# Altium PCB PowerBoard.PcbDoc (part 1 of 3)
Units mil, origin at the board's own origin, x right, y up, seen from the top; angles counter-clockwise.
Board outline 7560.09 x 3815.99 mil, 4 copper layers (Top Layer, Internal Plane 2, Internal Plane 1, Bottom Layer); 319 components, 249 nets, 1089 pads, 461 vias.
Unrouted connection lines stored in the file: 1.
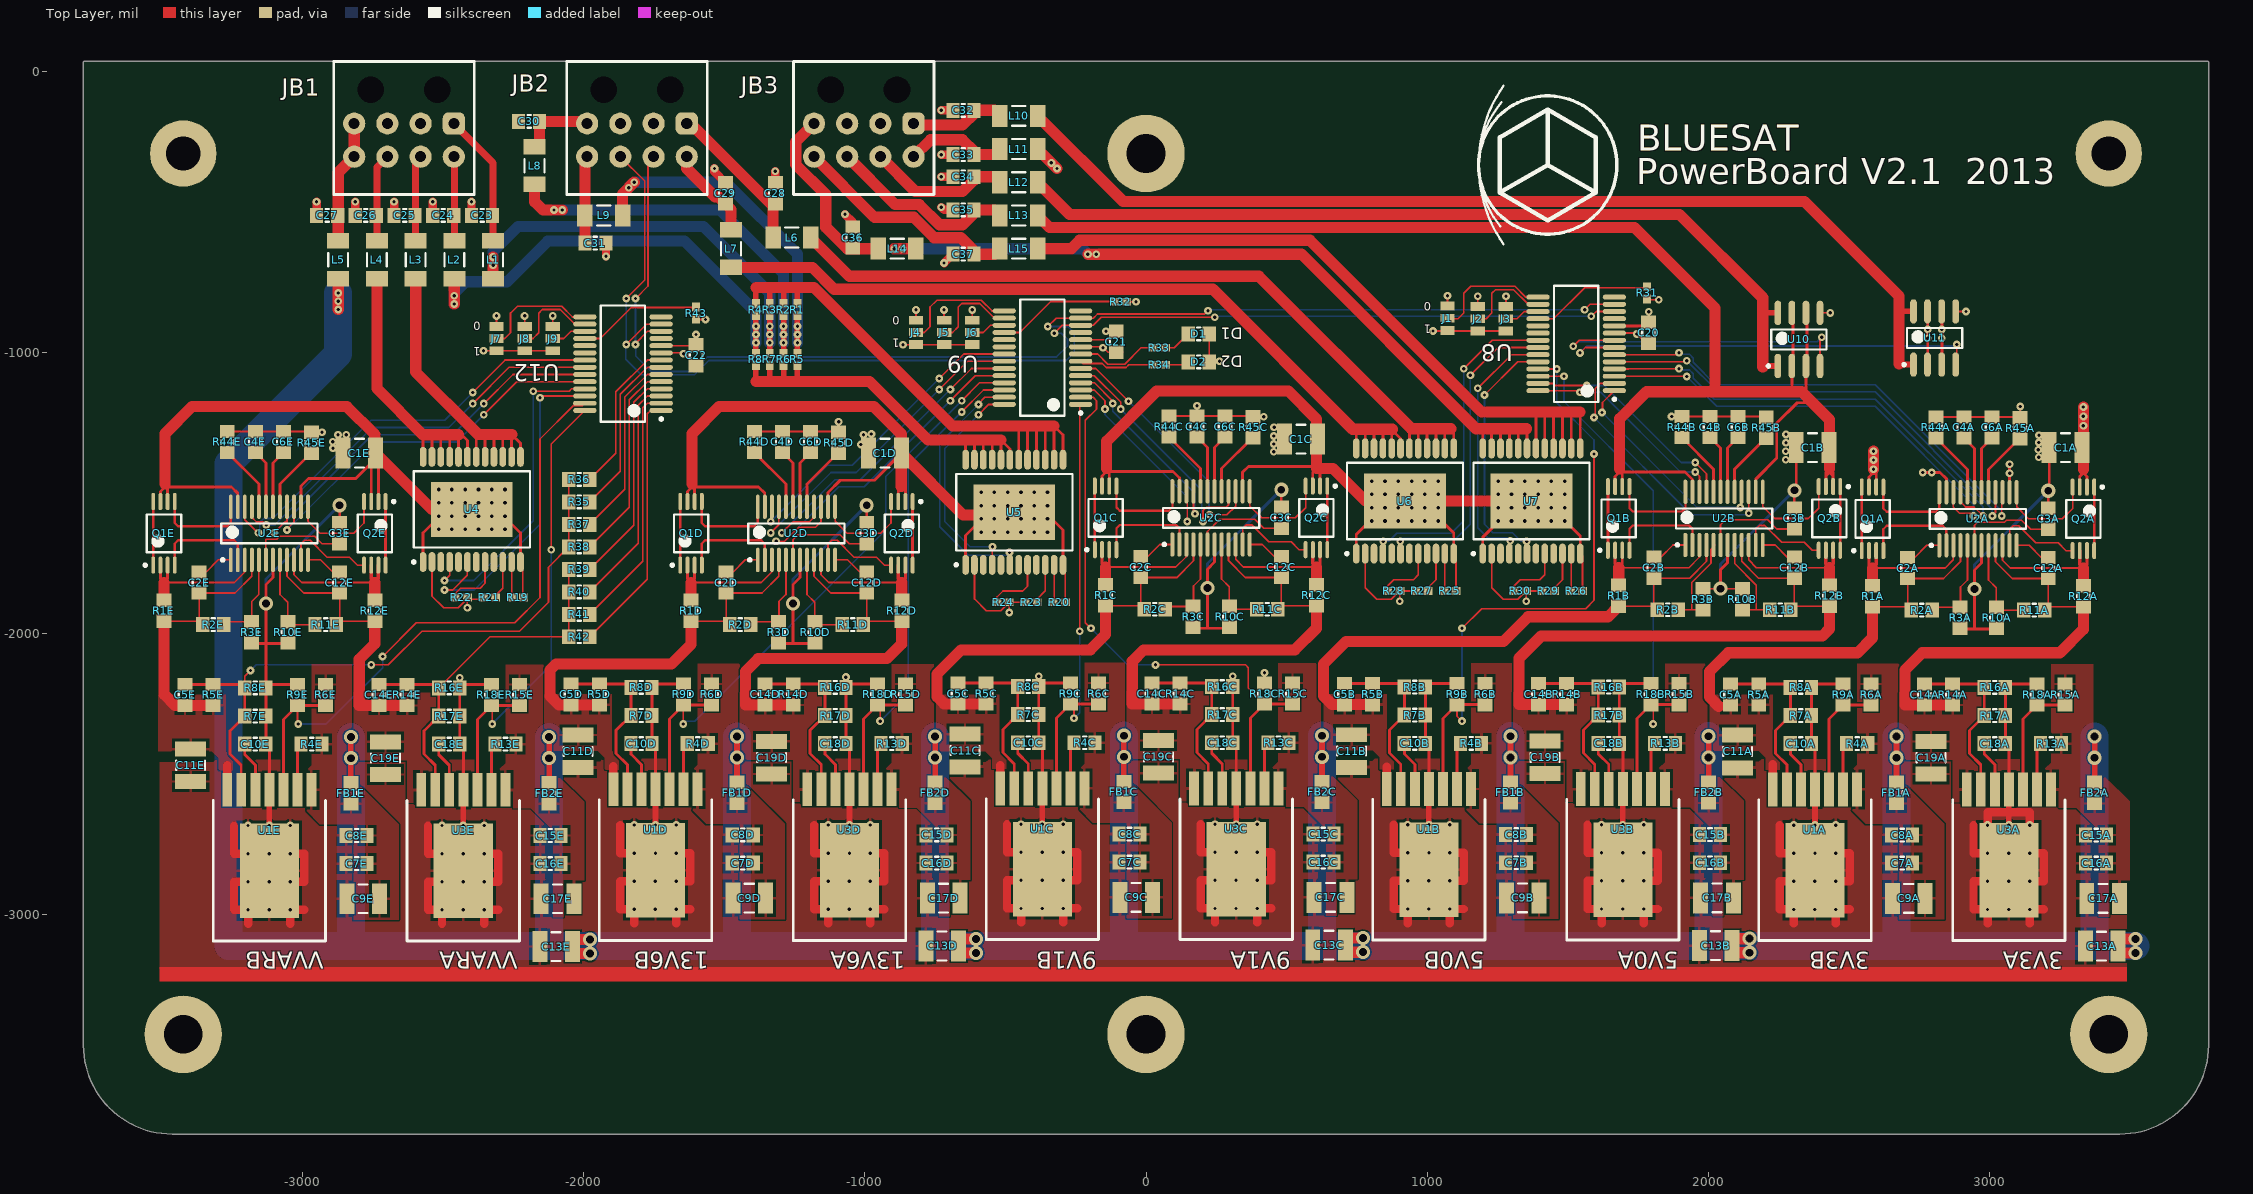
[diagram p0: Top Layer view]
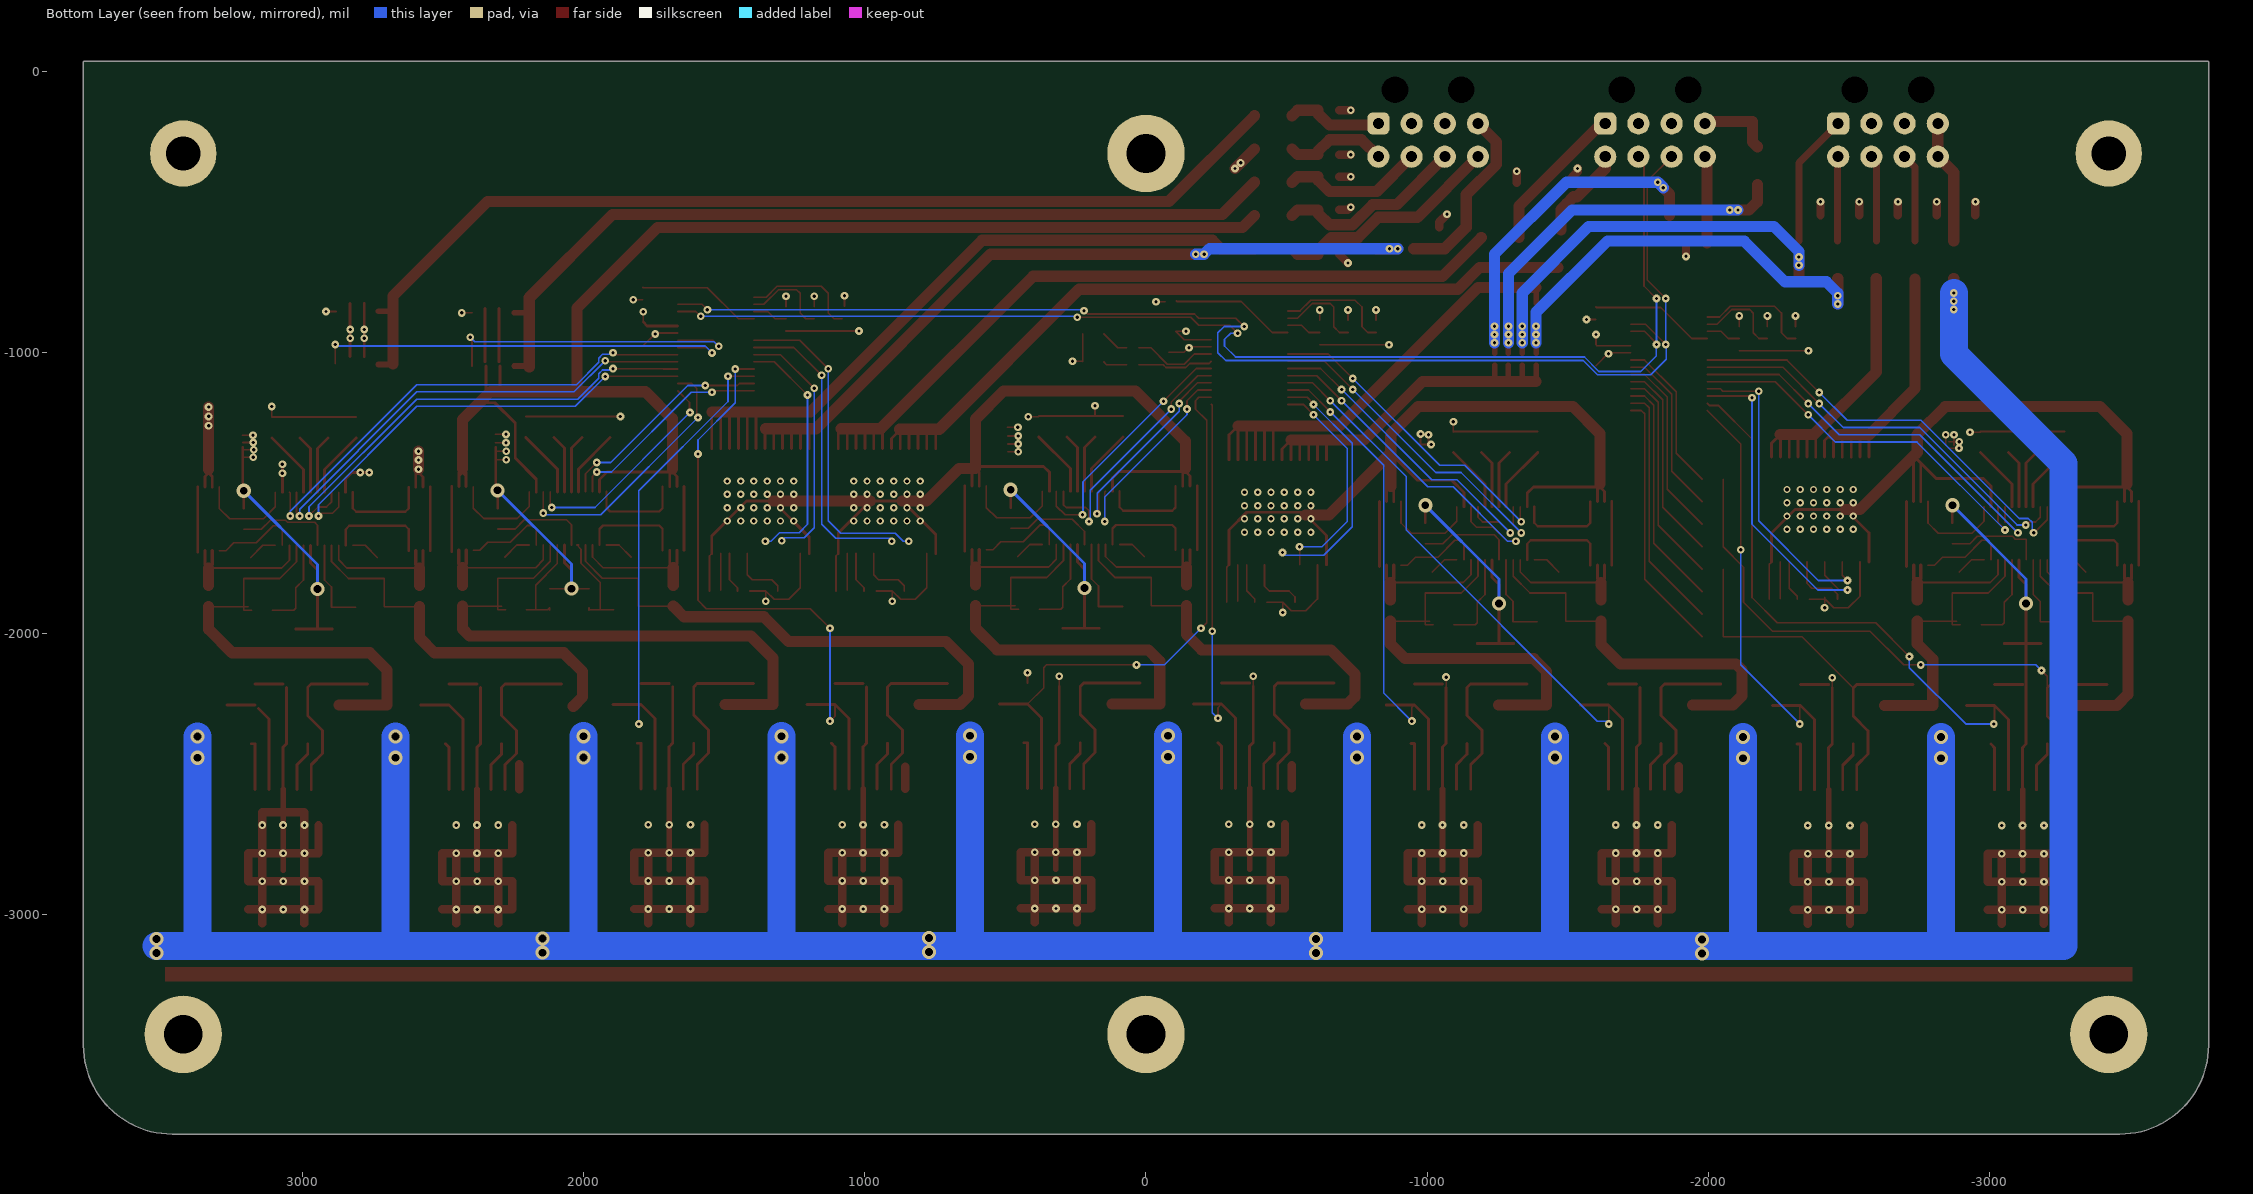
[diagram p1: Bottom Layer view, seen from below]
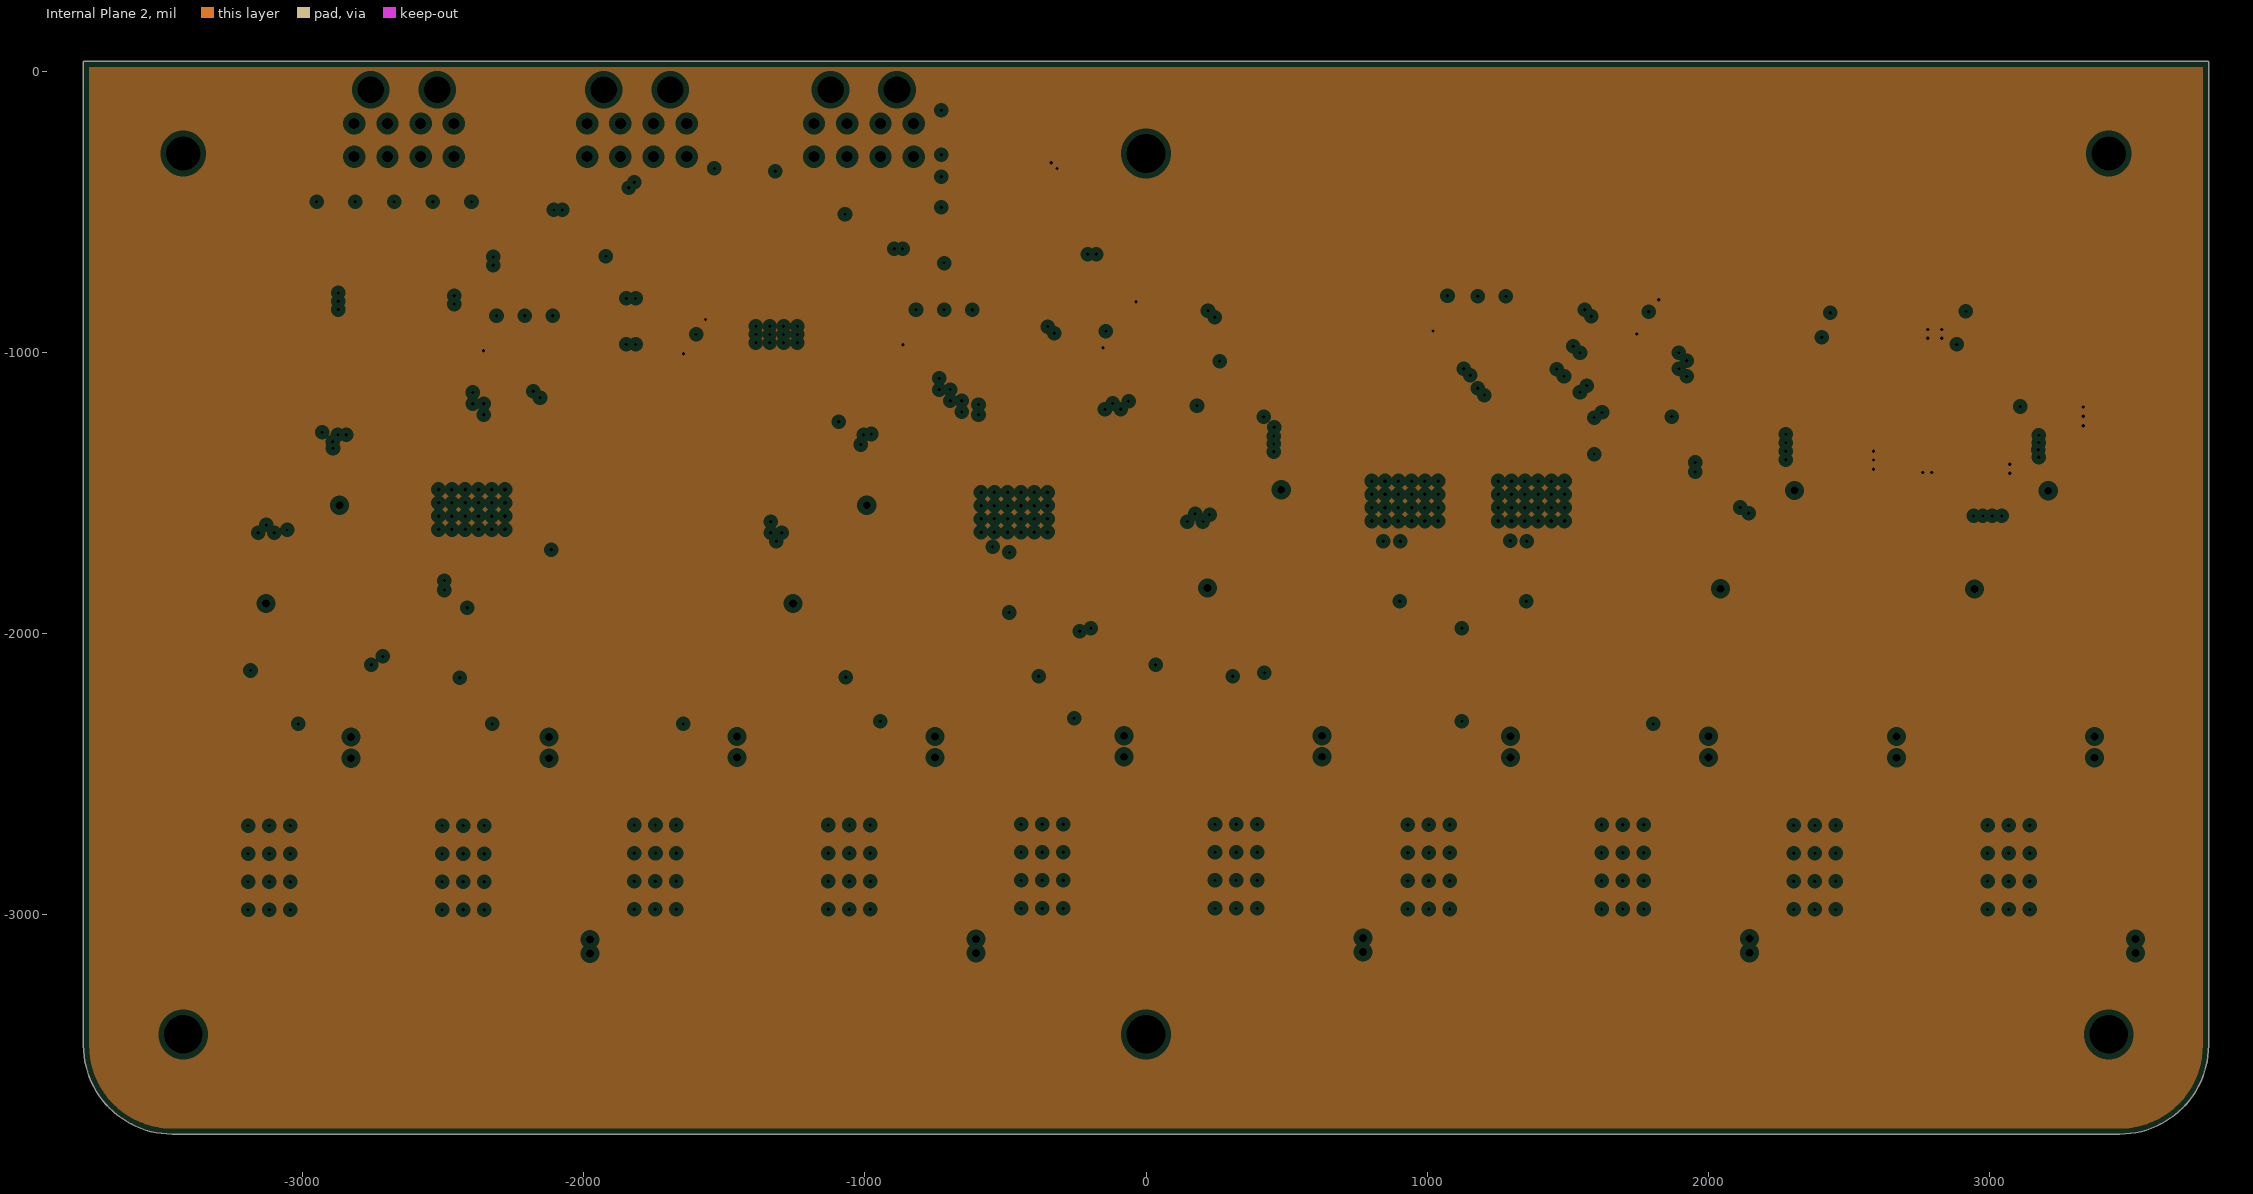
[diagram p2: Internal Plane 2, clearances drawn from the general rule]
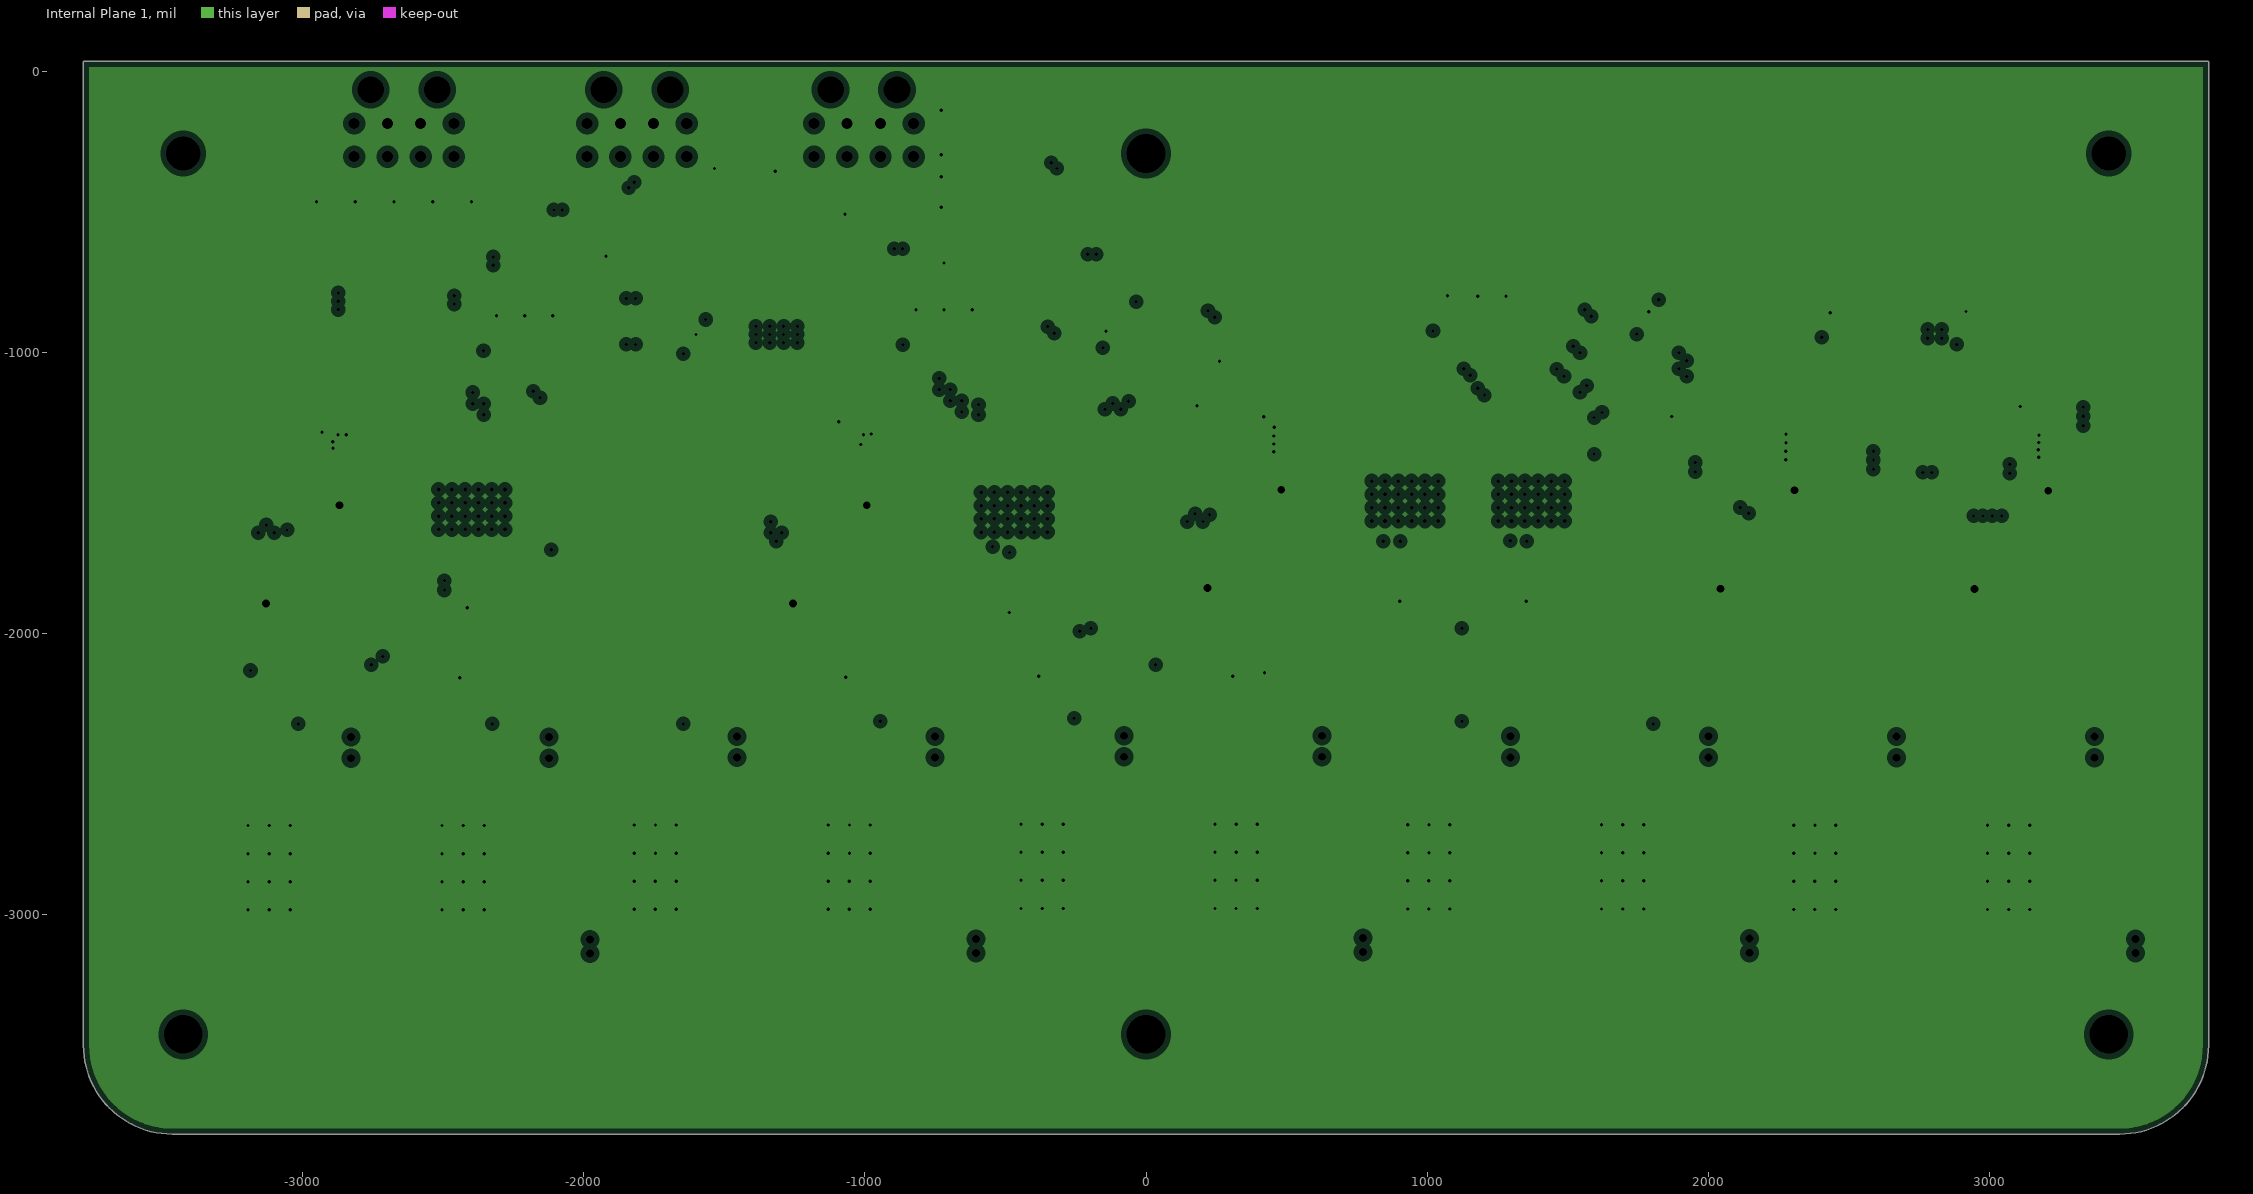
[diagram p3: Internal Plane 1, clearances drawn from the general rule]

## Layer stack, top to bottom
Top Layer: signal copper 1.4
Dielectric: core 12.6, FR-4, Dk 4.8
Internal Plane 2: plane copper 1.4, net 3V3_BUS
Dielectric: prepreg 12.6, FR-4, Dk 4.8
Internal Plane 1: plane copper 1.4, net GND
Dielectric: core 12.6, FR-4, Dk 4.8
Bottom Layer: signal copper 1.4

## Board outline
-3780.04,-3464.57 cw(c-3779.53,-3464.57) -3780.04,-3464.56 -3780.04,35.43 cw(c-3779.53,35.43) -3779.53,35.95 3779.53,35.95 cw(c3779.53,35.43) 3780.04,35.43 3780.04,-3464.57 ccw(c3779.53,-3464.57) 3780.04,-3464.56 3780.04,-3464.57 cw(c3464.57,-3464.57) 3464.57,-3780.04 -3464.57,-3780.04 cw(c-3464.57,-3779.53) -3464.58,-3780.04 cw(c-3464.57,-3464.57)

## Design rules (kind name [scope] priority, off if disabled: settings)
AssemblyTestPointUsage [All] p1 off:
AssemblyTestpoint [All] p1 off: testpointundercomponent=TRUE minsize=40 maxsize=100 preferedsize=60 minholesize=0 maxholesize=40 preferedholesize=32 testpointgrid=1 usegrid=TRUE gridtolerance=0.01 allowsidetop=TRUE allowsidebottom=TRUE
Clearance [All] p1: gap=6
ComponentClearance ComponentClearance_1 [OnLayer('Mechanical 1')] p1: gap=-100 collisioncheckmode=3 verticalgap=-199 showdistances=FALSE
ComponentClearance [All] p2: gap=10 collisioncheckmode=3 verticalgap=10 showdistances=FALSE
FabricationTestPointUsage [All] p1 off: valid=0 allowmultiple=FALSE
FabricationTestpoint [All] p1 off: side=3 testpointundercomponent=TRUE minsize=40 maxsize=100 preferedsize=60 minholesize=0 maxholesize=40 preferedholesize=32 testpointgrid=1 allowsidetop=TRUE allowsidebottom=TRUE usegrid=TRUE gridtolerance=0.01
HoleSize [All] p1: absolutevalues=TRUE maxlimit=10000 minlimit=1 maxpercent=80.000 minpercent=20.000
MinimumSolderMaskSliver [All] p1: minsoldermaskwidth=2
PlaneClearance [All] p1: clearance=20
PlaneConnect PlaneConnect_Vias [IsVia] p1: planeconnectstyle=Direct reliefexpansion=20 reliefentries=4 reliefconductorwidth=10 reliefairgap=10
PlaneConnect [All] p2: planeconnectstyle=Relief reliefexpansion=20 reliefentries=4 reliefconductorwidth=10 reliefairgap=10
PolygonConnect [All] p1: connectstyle=Relief reliefconductorwidth=10 reliefentries=4 polygonreliefangle="90 Angle" airgapwidth=10
RoomDefinition VVAR [InComponentClass('VVAR')] p1 off: confinementstyle=ConfineIn formatcopy=TRUE lockcomponents=FALSE outline -1987.21,-2865.79 -1987.21,-3019.65 -1992.21,-3019.65 -1992.21,-3189.65 -2205.12,-3189.65 -2205.12,-3107.72 -3333.66,-3107.72 -3333.66,-2574.17 -3475.51,-2574.17 -3475.51,-2000.55 -3542.05,-2000.55 -3542.05,-1808.23 -3580.43,-1808.23 -3580.43,-1477.21 -3316.97,-1477.21 -3316.97,-1234.88 -3220.2,-1234.88 -3020.28,-1234.88 -3020.28,-1237.48 -2920.28,-1237.48 -2920.28,-1280.79 -2692.13,-1280.79 -2692.13,-1477.21 -2656.89,-1477.21 -2656.89,-2134.88 -2280.28,-2134.88 -2180.28,-2134.88 -2180.28,-2484.88 -2075.28,-2484.88 -2075.28,-2669.33 -2035.83,-2669.33 -2035.83,-2865.79
RoomDefinition 13V6 [InComponentClass('13V6')] p2 off: confinementstyle=ConfineIn formatcopy=TRUE lockcomponents=FALSE outline -613.58,-2863.86 -613.58,-3017.72 -618.58,-3017.72 -618.58,-3187.72 -831.5,-3187.72 -831.5,-3105.79 -1960.04,-3105.79 -1960.04,-2524.84 -2096.97,-2524.84 -2096.97,-1998.62 -2168.42,-1998.62 -2168.42,-1806.3 -2206.81,-1806.3 -2206.81,-1475.28 -1943.43,-1475.28 -1943.43,-1232.95 -1846.65,-1232.95 -1646.65,-1232.95 -1646.65,-1235.55 -1546.65,-1235.55 -1546.65,-1409.33 -1093.11,-1409.33 -1093.11,-2132.95 -906.65,-2132.95 -806.65,-2132.95 -806.65,-2482.95 -701.65,-2482.95 -701.65,-2667.4 -662.2,-2667.4 -662.2,-2863.86
RoomDefinition 9V1 [InComponentClass('9V1')] p3 off: confinementstyle=ConfineIn formatcopy=TRUE lockcomponents=FALSE outline 762.79,-2860.79 762.79,-3014.65 757.79,-3014.65 757.79,-3184.65 544.88,-3184.65 544.88,-3102.72 -583.66,-3102.72 -583.66,-2521.77 -720.59,-2521.77 -720.59,-1995.55 -792.05,-1995.55 -792.05,-1803.23 -830.43,-1803.23 -830.43,-1472.21 -567.05,-1472.21 -567.05,-1229.88 -470.28,-1229.88 -270.28,-1229.88 -270.28,-1232.48 -170.28,-1232.48 -170.28,-1406.26 283.27,-1406.26 283.27,-2129.88 469.72,-2129.88 569.72,-2129.88 569.72,-2479.88 674.72,-2479.88 674.72,-2664.33 714.17,-2664.33 714.17,-2860.79
RoomDefinition 3V3 [InComponentClass('3V3')] p4 off: confinementstyle=ConfineIn formatcopy=TRUE lockcomponents=FALSE outline 3511.38,-2864.21 3511.38,-3018.07 3506.38,-3018.07 3506.38,-3188.07 3293.46,-3188.07 3293.46,-3106.14 2164.92,-3106.14 2164.92,-2525.2 2027.99,-2525.2 2027.99,-1998.98 1956.53,-1998.98 1956.53,-1806.65 1918.15,-1806.65 1918.15,-1475.63 2181.54,-1475.63 2181.54,-1233.31 2278.31,-1233.31 2478.31,-1233.31 2478.31,-1235.91 2578.31,-1235.91 2578.31,-1409.69 3031.85,-1409.69 3031.85,-2133.31 3218.31,-2133.31 3318.31,-2133.31 3318.31,-2483.31 3423.31,-2483.31 3423.31,-2667.76 3462.76,-2667.76 3462.76,-2864.21
RoutingVias [All] p1: holewidth=11.81 width=27.56 viastyle="Through Hole" minholewidth=11.81 minwidth=23.62 maxholewidth=28 maxwidth=50
SilkToSolderMaskClearance SilkscreenOverComponentPads [IsPad] p1: minsilkscreentomaskgap=3 clearancetoexposedcopper=TRUE
SolderMaskExpansion [All] p1: expansion=1
Width [All] p1: maxlimit=100 minlimit=6 preferedwidth=10
18 further rules are at their usual default settings.

## Classes and differential pairs
channel class RedundantReg: 3V3 5V0 9V1 13V6 VVAR
component class VVAR: C1E C2E C3E C4E C5E C6E C7E C8E C9E C10E C11E C12E C13E C14E C15E C16E C17E C18E C19E FB1E FB2E Q1E Q2E R1E R2E R3E R4E R5E R6E R7E R8E R9E R10E R11E R12E R13E R14E R15E R16E R17E R18E R44E R45E U1E U2E U3E
component class Regulation: C20 C21 C22 D1 D2 J1 J2 J3 J4 J5 J6 J7 J8 J9 R19 R20 R21 R22 R23 R24 R25 R26 R27 R28 R29 R30 R31 R32 R33 R34 R35 R36 R37 R38 R39 R40 R41 R42 R43 U4 U5 U6 U7 U8 U9 U10 U11 U12
component class PowerBoard: C23 C24 C25 C26 C27 C28 C29 C30 C31 C32 C33 C34 C35 C36 C37 JB1 JB2 JB3 L1 L2 L3 L4 L5 L6 L7 L8 L9 L10 L11 L12 L13 L14 L15 R1 R2 R3 R4 R5 R6 R7 R8
component class 13V6: C1D C2D C3D C4D C5D C6D C7D C8D C9D C10D C11D C12D C13D C14D C15D C16D C17D C18D C19D FB1D FB2D Q1D Q2D R1D R2D R3D R4D R5D R6D R7D R8D R9D R10D R11D R12D R13D R14D R15D R16D R17D R18D R44D R45D U1D U2D U3D
component class 9V1: C1C C2C C3C C4C C5C C6C C7C C8C C9C C10C C11C C12C C13C C14C C15C C16C C17C C18C C19C FB1C FB2C Q1C Q2C R1C R2C R3C R4C R5C R6C R7C R8C R9C R10C R11C R12C R13C R14C R15C R16C R17C R18C R44C R45C U1C U2C U3C
component class 5V0: C1B C2B C3B C4B C5B C6B C7B C8B C9B C10B C11B C12B C13B C14B C15B C16B C17B C18B C19B FB1B FB2B Q1B Q2B R1B R2B R3B R4B R5B R6B R7B R8B R9B R10B R11B R12B R13B R14B R15B R16B R17B R18B R44B R45B U1B U2B U3B
component class 3V3: C1A C2A C3A C4A C5A C6A C7A C8A C9A C10A C11A C12A C13A C14A C15A C16A C17A C18A C19A FB1A FB2A Q1A Q2A R1A R2A R3A R4A R5A R6A R7A R8A R9A R10A R11A R12A R13A R14A R15A R16A R17A R18A R44A R45A U1A U2A U3A

## Components (designator, comment, footprint, x,y, rotation, side; value= is the part's Value field where it differs from the comment)
C1A "COUT2" R1210M 3271.42,-1337.72 r0 top (schematic designator C1)
C1B "COUT2" R1210M 2371.42,-1337.72 r0 top (schematic designator C1)
C1C "COUT2" R1210M 551.42,-1307.72 r0 top (schematic designator C1)
C1D "COUT2" R1210M -928.58,-1357.72 r0 top (schematic designator C1)
C1E "COUT2" R1210M -2798.58,-1357.72 r0 top (schematic designator C1)
C2A "" R0805M 2709.92,-1766.14 r90 top (schematic designator C2)
C2B "" R0805M 1806.57,-1764.65 r90 top (schematic designator C2)
C2C "" R0805M -18.66,-1762.72 r90 top (schematic designator C2)
C2D "" R0805M -1493.58,-1817.72 r90 top (schematic designator C2)
C2E "" R0805M -3368.66,-1817.72 r90 top (schematic designator C2)
C3A "" R0805M 3209.92,-1591.14 r90 top (schematic designator C3)
C3B "" R0805M 2306.57,-1589.65 r90 top (schematic designator C3)
C3C "" R0805M 481.34,-1587.72 r90 top (schematic designator C3)
C3D "" R0805M -993.58,-1642.72 r90 top (schematic designator C3)
C3E "" R0805M -2868.66,-1642.72 r90 top (schematic designator C3)
C4A "" R0805M 2909.92,-1266.14 r270 top (schematic designator C4)
C4B "" R0805M 2006.57,-1264.65 r270 top (schematic designator C4)
C4C "" R0805M 181.34,-1262.72 r270 top (schematic designator C4)
C4D "" R0805M -1293.58,-1317.72 r270 top (schematic designator C4)
C4E "" R0805M -3168.66,-1317.72 r270 top (schematic designator C4)
C5A "CFF" R0805M 2079.92,-2216.14 r270 top (schematic designator C5)
C5B "CFF" R0805M 706.57,-2214.65 r270 top (schematic designator C5)
C5C "CFF" R0805M -668.66,-2212.72 r270 top (schematic designator C5)
C5D "CFF" R0805M -2045.04,-2215.79 r270 top (schematic designator C5)
C5E "CFF" R0805M -3418.66,-2217.72 r270 top (schematic designator C5)
C6A "" R0805M 3009.92,-1266.14 r270 top (schematic designator C6)
C6B "" R0805M 2106.57,-1264.65 r270 top (schematic designator C6)
C6C "" R0805M 281.34,-1262.72 r270 top (schematic designator C6)
C6D "" R0805M -1193.58,-1317.72 r270 top (schematic designator C6)
C6E "" R0805M -3068.66,-1317.72 r270 top (schematic designator C6)
C7A "CIN" R0805M 2689.92,-2816.14 r0 top (schematic designator C7)
C7B "CIN" R0805M 1316.57,-2814.65 r0 top (schematic designator C7)
C7C "CIN" R0805M -58.66,-2812.72 r0 top (schematic designator C7)
C7D "CIN" R0805M -1435.04,-2815.79 r0 top (schematic designator C7)
C7E "CIN" R0805M -2808.66,-2817.72 r0 top (schematic designator C7)
C8A "CIN" R0805M 2689.92,-2716.14 r0 top (schematic designator C8)
C8B "CIN" R0805M 1316.57,-2714.65 r0 top (schematic designator C8)
C8C "CIN" R0805M -58.66,-2712.72 r0 top (schematic designator C8)
C8D "CIN" R0805M -1435.04,-2715.79 r0 top (schematic designator C8)
C8E "CIN" R0805M -2808.66,-2717.72 r0 top (schematic designator C8)
C9A "CIN" R1210M 2713.54,-2941.14 r180 top (schematic designator C9)
C9B "CIN" R1210M 1340.2,-2939.65 r180 top (schematic designator C9)
C9C "CIN" R1210M -35.04,-2937.72 r180 top (schematic designator C9)
C9D "CIN" R1210M -1411.42,-2940.79 r180 top (schematic designator C9)
C9E "CIN" R1210M -2785.04,-2942.72 r180 top (schematic designator C9)
C10A "CSS" R0805M 2329.92,-2391.14 r0 top (schematic designator C10)
C10B "CSS" R0805M 956.57,-2389.65 r0 top (schematic designator C10)
C10C "CSS" R0805M -418.66,-2387.72 r0 top (schematic designator C10)
C10D "CSS" R0805M -1795.04,-2390.79 r0 top (schematic designator C10)
C10E "CSS" R0805M -3168.66,-2392.72 r0 top (schematic designator C10)
C11A "COUT" R1210M 2104.92,-2418.74 r90 top (schematic designator C11)
C11B "COUT" R1210M 731.57,-2417.24 r90 top (schematic designator C11)
C11C "COUT" R1210M -643.66,-2415.32 r90 top (schematic designator C11)
C11D "COUT" R1210M -2020.04,-2418.39 r90 top (schematic designator C11)
C11E "COUT" R1210M -3398.58,-2467.72 r90 top (schematic designator C11)
C12A "" R0805M 3209.92,-1766.14 r270 top (schematic designator C12)
C12B "" R0805M 2306.57,-1764.65 r270 top (schematic designator C12)
C12C "" R0805M 481.34,-1762.72 r270 top (schematic designator C12)
C12D "" R0805M -993.58,-1817.72 r270 top (schematic designator C12)
C12E "" R0805M -2868.66,-1817.72 r270 top (schematic designator C12)
C13A "" R1210M 3399.92,-3111.14 r180 top (schematic designator C13)
C13B "" R1210M 2026.57,-3109.65 r180 top (schematic designator C13)
C13C "" R1210M 651.34,-3107.72 r180 top (schematic designator C13)
C13D "" R1210M -725.04,-3110.79 r180 top (schematic designator C13)
C13E "" R1210M -2098.66,-3112.72 r180 top (schematic designator C13)
C14A "CFF" R0805M 2769.92,-2216.14 r270 top (schematic designator C14)
C14B "CFF" R0805M 1396.57,-2214.65 r270 top (schematic designator C14)
C14C "CFF" R0805M 21.34,-2212.72 r270 top (schematic designator C14)
C14D "CFF" R0805M -1355.04,-2215.79 r270 top (schematic designator C14)
C14E "CFF" R0805M -2728.66,-2217.72 r270 top (schematic designator C14)
C15A "CIN" R0805M 3379.92,-2716.14 r0 top (schematic designator C15)
C15B "CIN" R0805M 2006.57,-2714.65 r0 top (schematic designator C15)
C15C "CIN" R0805M 631.34,-2712.72 r0 top (schematic designator C15)
C15D "CIN" R0805M -745.04,-2715.79 r0 top (schematic designator C15)
C15E "CIN" R0805M -2118.66,-2717.72 r0 top (schematic designator C15)
C16A "CIN" R0805M 3379.92,-2816.14 r0 top (schematic designator C16)
C16B "CIN" R0805M 2006.57,-2814.65 r0 top (schematic designator C16)
C16C "CIN" R0805M 631.34,-2812.72 r0 top (schematic designator C16)
C16D "CIN" R0805M -745.04,-2815.79 r0 top (schematic designator C16)
C16E "CIN" R0805M -2118.66,-2817.72 r0 top (schematic designator C16)
C17A "CIN" R1210M 3404.92,-2941.14 r180 top (schematic designator C17)
C17B "CIN" R1210M 2031.57,-2939.65 r180 top (schematic designator C17)
C17C "CIN" R1210M 656.34,-2937.72 r180 top (schematic designator C17)
C17D "CIN" R1210M -720.04,-2940.79 r180 top (schematic designator C17)
C17E "CIN" R1210M -2093.66,-2942.72 r180 top (schematic designator C17)
C18A "CSS" R0805M 3019.92,-2391.14 r0 top (schematic designator C18)
C18B "CSS" R0805M 1646.57,-2389.65 r0 top (schematic designator C18)
C18C "CSS" R0805M 271.34,-2387.72 r0 top (schematic designator C18)
C18D "CSS" R0805M -1105.04,-2390.79 r0 top (schematic designator C18)
C18E "CSS" R0805M -2478.66,-2392.72 r0 top (schematic designator C18)
C19A "COUT" R1210M 2792.99,-2441.14 r90 top (schematic designator C19)
C19B "COUT" R1210M 1419.64,-2439.65 r90 top (schematic designator C19)
C19C "COUT" R1210M 44.41,-2437.72 r90 top (schematic designator C19)
C19D "COUT" R1210M -1331.97,-2440.79 r90 top (schematic designator C19)
C19E "COUT" R1210M -2705.59,-2442.72 r90 top (schematic designator C19)
C20 "" R0805M 1788.19,-928.66 r90 top
C21 "" R0805M -105.91,-960.71 r90 top
C22 "" R0805M -1600.72,-1009.14 r90 top
C23 "" R0805M -2362.2,-511.81 r180 top
C24 "" R0805M -2500,-511.81 r180 top
C25 "" R0805M -2637.8,-511.81 r180 top
C26 "" R0805M -2775.59,-511.81 r180 top
C27 "" R0805M -2913.39,-511.81 r180 top
C28 "" R0805M -1318.9,-433.07 r90 top
C29 "" R0805M -1496.06,-433.07 r90 top
C30 "" R0805M -2194.88,-177.17 r180 top
C31 "" R0805M -1958.66,-610.24 r0 top
C32 "" R0805M -649.61,-137.8 r180 top
C33 "" R0805M -649.61,-295.28 r180 top
C34 "" R0805M -649.61,-374.02 r180 top
C35 "" R0805M -649.61,-492.13 r180 top
C36 "" R0805M -1043.31,-590.55 r90 top
C37 "" R0805M -649.61,-649.61 r180 top
D1 "LED0" R0805M 187.72,-932.76 r0 top
D2 "LED0" R0805M 187.72,-1032.76 r0 top
FB1A "" R0805M 2669.92,-2566.14 r90 top (schematic designator FB1)
FB1B "" R0805M 1296.57,-2564.65 r90 top (schematic designator FB1)
FB1C "" R0805M -78.66,-2562.72 r90 top (schematic designator FB1)
FB1D "" R0805M -1455.04,-2565.79 r90 top (schematic designator FB1)
FB1E "" R0805M -2828.66,-2567.72 r90 top (schematic designator FB1)
FB2A "" R0805M 3374.92,-2566.14 r90 top (schematic designator FB2)
FB2B "" R0805M 2001.57,-2564.65 r90 top (schematic designator FB2)
FB2C "" R0805M 626.34,-2562.72 r90 top (schematic designator FB2)
FB2D "" R0805M -750.04,-2565.79 r90 top (schematic designator FB2)
FB2E "" R0805M -2123.66,-2567.72 r90 top (schematic designator FB2)
J1 "3-WAY JUMPER" J1205M 1072.6,-877.09 r90 top
J2 "3-WAY JUMPER" J1205M 1180.47,-879.01 r90 top
J3 "3-WAY JUMPER" J1205M 1280.47,-879.01 r90 top
J4 "3-WAY JUMPER" J1205M -818.35,-927.72 r90 top
J5 "3-WAY JUMPER" J1205M -718.35,-927.72 r90 top
J6 "3-WAY JUMPER" J1205M -618.35,-927.72 r90 top
J7 "3-WAY JUMPER" J1205M -2310.72,-949.48 r90 top
J8 "3-WAY JUMPER" J1205M -2210.72,-949.48 r90 top
J9 "3-WAY JUMPER" J1205M -2110.72,-949.48 r90 top
JB1 "447640802" "MOLEX 447640802" -2639.76,35.43 r180 top
JB2 "447640802" "MOLEX 447640802" -1811.02,35.43 r180 top
JB3 "447640802" "MOLEX 447640802" -1003.94,35.43 r180 top
L1 "BLM31PG121SN1L" INDC3216M -2322.83,-669.29 r90 top
L2 "BLM31PG121SN1L" INDC3216M -2460.63,-669.29 r90 top
L3 "BLM31PG121SN1L" INDC3216M -2598.43,-669.29 r90 top
L4 "BLM31PG121SN1L" INDC3216M -2736.22,-669.29 r90 top
L5 "BLM31PG121SN1L" INDC3216M -2874.02,-669.29 r90 top
L6 "BLM31PG121SN1L" INDC3216M -1259.84,-590.55 r180 top
L7 "BLM31PG121SN1L" INDC3216M -1476.38,-629.92 r90 top
L8 "BLM31PG121SN1L" INDC3216M -2175.2,-334.65 r90 top
L9 "BLM31PG121SN1L" INDC3216M -1929.13,-511.81 r180 top
L10 "BLM31PG121SN1L" INDC3216M -452.76,-157.48 r180 top
L11 "BLM31PG121SN1L" INDC3216M -452.76,-275.59 r180 top
L12 "BLM31PG121SN1L" INDC3216M -452.76,-393.7 r180 top
L13 "BLM31PG121SN1L" INDC3216M -452.76,-511.81 r180 top
L14 "BLM31PG121SN1L" INDC3216M -885.83,-629.92 r180 top
L15 "BLM31PG121SN1L" INDC3216M -452.76,-629.92 r180 top
Q1A "IRF8852" TSSOP8 2584.92,-1591.14 r90 top (schematic designator Q1)
Q1B "IRF8852" TSSOP8 1681.57,-1589.65 r90 top (schematic designator Q1)
Q1C "IRF8852" TSSOP8 -143.66,-1587.72 r90 top (schematic designator Q1)
Q1D "IRF8852" TSSOP8 -1618.58,-1642.72 r90 top (schematic designator Q1)
Q1E "IRF8852" TSSOP8 -3493.66,-1642.72 r90 top (schematic designator Q1)
Q2A "IRF8852" TSSOP8 3334.92,-1591.14 r270 top (schematic designator Q2)
Q2B "IRF8852" TSSOP8 2431.57,-1589.65 r270 top (schematic designator Q2)
Q2C "IRF8852" TSSOP8 606.34,-1587.72 r270 top (schematic designator Q2)
Q2D "IRF8852" TSSOP8 -868.58,-1642.72 r270 top (schematic designator Q2)
Q2E "IRF8852" TSSOP8 -2743.66,-1642.72 r270 top (schematic designator Q2)
R1 "" R0402M -1240.16,-846.46 r270 top
R1A "ISENSE" R0805M 2584.92,-1866.14 r90 top (schematic designator R1)
R1B "ISENSE" R0805M 1681.57,-1864.65 r90 top (schematic designator R1)
R1C "ISENSE" R0805M -143.66,-1862.72 r90 top (schematic designator R1)
R1D "ISENSE" R0805M -1618.58,-1917.72 r90 top (schematic designator R1)
R1E "ISENSE" R0805M -3493.66,-1917.72 r90 top (schematic designator R1)
R2 "" R0402M -1289.37,-846.46 r90 top
R2A "ON1" R0805M 2759.92,-1916.14 r0 top (schematic designator R2)
R2B "ON1" R0805M 1856.57,-1914.65 r0 top (schematic designator R2)
R2C "ON1" R0805M 31.34,-1912.72 r0 top (schematic designator R2)
R2D "ON1" R0805M -1443.58,-1967.72 r0 top (schematic designator R2)
R2E "ON1" R0805M -3318.66,-1967.72 r0 top (schematic designator R2)
R3 "" R0402M -1338.58,-846.46 r90 top
R3A "ON2" R0805M 2896.42,-1942.72 r90 top (schematic designator R3)
R3B "ON2" R0805M 1981.42,-1877.72 r270 top (schematic designator R3)
R3C "ON2" R0805M 167.83,-1939.29 r90 top (schematic designator R3)
R3D "ON2" R0805M -1307.09,-1994.29 r90 top (schematic designator R3)
R3E "ON2" R0805M -3182.17,-1994.29 r90 top (schematic designator R3)
R4 "" R0402M -1387.8,-846.46 r90 top
R4A "RON" R0805M 2529.92,-2391.14 r0 top (schematic designator R4)
R4B "RON" R0805M 1156.57,-2389.65 r0 top (schematic designator R4)
R4C "RON" R0805M -218.66,-2387.72 r0 top (schematic designator R4)
R4D "RON" R0805M -1595.04,-2390.79 r0 top (schematic designator R4)
R4E "RON" R0805M -2968.66,-2392.72 r0 top (schematic designator R4)
R5 "" R0402M -1240.16,-1023.62 r90 top
R5A "RFBT" R0805M 2179.92,-2216.14 r270 top (schematic designator R5)
R5B "RFBT" R0805M 806.57,-2214.65 r270 top (schematic designator R5)
R5C "RFBT" R0805M -568.66,-2212.72 r270 top (schematic designator R5)
R5D "RFBT" R0805M -1945.04,-2215.79 r270 top (schematic designator R5)
R5E "RFBT" R0805M -3318.66,-2217.72 r270 top (schematic designator R5)
R6 "" R0402M -1289.37,-1023.62 r270 top
R6A "RENT" R0805M 2579.92,-2216.14 r270 top (schematic designator R6)
R6B "RENT" R0805M 1206.57,-2214.65 r270 top (schematic designator R6)
R6C "RENT" R0805M -168.66,-2212.72 r270 top (schematic designator R6)
R6D "RENT" R0805M -1545.04,-2215.79 r270 top (schematic designator R6)
R6E "RENT" R0805M -2918.66,-2217.72 r270 top (schematic designator R6)
R7 "" R0402M -1338.58,-1023.62 r270 top
R7A "RFBB" R0805M 2329.92,-2291.14 r180 top (schematic designator R7)
R7B "RFBB" R0805M 956.57,-2289.65 r180 top (schematic designator R7)
R7C "RFBB" R0805M -418.66,-2287.72 r180 top (schematic designator R7)
R7D "RFBB" R0805M -1795.04,-2290.79 r180 top (schematic designator R7)
R7E "RFBB" R0805M -3168.66,-2292.72 r180 top (schematic designator R7)
R8 "" R0402M -1387.8,-1023.62 r270 top
R8A "RFBB" R0805M 2329.92,-2191.14 r180 top (schematic designator R8)
R8B "RFBB" R0805M 956.57,-2189.65 r180 top (schematic designator R8)
R8C "RFBB" R0805M -418.66,-2187.72 r180 top (schematic designator R8)
R8D "RFBB" R0805M -1795.04,-2190.79 r180 top (schematic designator R8)
R8E "RFBB" R0805M -3168.66,-2192.72 r180 top (schematic designator R8)
R9A "RENB" R0805M 2479.92,-2216.14 r90 top (schematic designator R9)
R9B "RENB" R0805M 1106.57,-2214.65 r90 top (schematic designator R9)
R9C "RENB" R0805M -268.66,-2212.72 r90 top (schematic designator R9)
R9D "RENB" R0805M -1645.04,-2215.79 r90 top (schematic designator R9)
R9E "RENB" R0805M -3018.66,-2217.72 r90 top (schematic designator R9)
R10A "ON2" R0805M 3026.42,-1942.72 r90 top (schematic designator R10)
R10B "ON2" R0805M 2121.57,-1877.72 r270 top (schematic designator R10)
R10C "ON2" R0805M 297.83,-1939.29 r90 top (schematic designator R10)
R10D "ON2" R0805M -1177.09,-1994.29 r90 top (schematic designator R10)
R10E "ON2" R0805M -3052.17,-1994.29 r90 top (schematic designator R10)
R11A "ON1" R0805M 3159.92,-1916.14 r180 top (schematic designator R11)
R11B "ON1" R0805M 2256.57,-1914.65 r180 top (schematic designator R11)
R11C "ON1" R0805M 431.34,-1912.72 r180 top (schematic designator R11)
R11D "ON1" R0805M -1043.58,-1967.72 r180 top (schematic designator R11)
R11E "ON1" R0805M -2918.66,-1967.72 r180 top (schematic designator R11)
R12A "ISENSE" R0805M 3334.92,-1866.14 r90 top (schematic designator R12)
R12B "ISENSE" R0805M 2431.57,-1864.65 r90 top (schematic designator R12)
R12C "ISENSE" R0805M 606.34,-1862.72 r90 top (schematic designator R12)
R12D "ISENSE" R0805M -868.58,-1917.72 r90 top (schematic designator R12)
R12E "ISENSE" R0805M -2743.66,-1917.72 r90 top (schematic designator R12)
R13A "RON" R0805M 3219.92,-2391.14 r0 top (schematic designator R13)
R13B "RON" R0805M 1846.57,-2389.65 r0 top (schematic designator R13)
R13C "RON" R0805M 471.34,-2387.72 r0 top (schematic designator R13)
R13D "RON" R0805M -905.04,-2390.79 r0 top (schematic designator R13)
R13E "RON" R0805M -2278.66,-2392.72 r0 top (schematic designator R13)
R14A "RFBT" R0805M 2869.92,-2216.14 r270 top (schematic designator R14)
R14B "RFBT" R0805M 1496.57,-2214.65 r270 top (schematic designator R14)
R14C "RFBT" R0805M 121.34,-2212.72 r270 top (schematic designator R14)
R14D "RFBT" R0805M -1255.04,-2215.79 r270 top (schematic designator R14)
R14E "RFBT" R0805M -2628.66,-2217.72 r270 top (schematic designator R14)
R15A "RENT" R0805M 3269.92,-2216.14 r270 top (schematic designator R15)
R15B "RENT" R0805M 1896.57,-2214.65 r270 top (schematic designator R15)
R15C "RENT" R0805M 521.34,-2212.72 r270 top (schematic designator R15)
R15D "RENT" R0805M -855.04,-2215.79 r270 top (schematic designator R15)
R15E "RENT" R0805M -2228.66,-2217.72 r270 top (schematic designator R15)
R16A "RFBB" R0805M 3019.92,-2191.14 r180 top (schematic designator R16)
R16B "RFBB" R0805M 1646.57,-2189.65 r180 top (schematic designator R16)
R16C "RFBB" R0805M 271.34,-2187.72 r180 top (schematic designator R16)
R16D "RFBB" R0805M -1105.04,-2190.79 r180 top (schematic designator R16)
R16E "RFBB" R0805M -2478.66,-2192.72 r180 top (schematic designator R16)
R17A "RFBB" R0805M 3019.92,-2291.14 r180 top (schematic designator R17)
R17B "RFBB" R0805M 1646.57,-2289.65 r180 top (schematic designator R17)
R17C "RFBB" R0805M 271.34,-2287.72 r180 top (schematic designator R17)
R17D "RFBB" R0805M -1105.04,-2290.79 r180 top (schematic designator R17)
R17E "RFBB" R0805M -2478.66,-2292.72 r180 top (schematic designator R17)
R18A "RENB" R0805M 3169.92,-2216.14 r90 top (schematic designator R18)
R18B "RENB" R0805M 1796.57,-2214.65 r90 top (schematic designator R18)
R18C "RENB" R0805M 421.34,-2212.72 r90 top (schematic designator R18)
R18D "RENB" R0805M -955.04,-2215.79 r90 top (schematic designator R18)
R18E "RENB" R0805M -2328.66,-2217.72 r90 top (schematic designator R18)
R19 "" R0402M -2235.91,-1870.71 r180 top
R20 "" R0402M -308.58,-1887.72 r180 top
R21 "" R0402M -2335.91,-1870.71 r180 top
R22 "" R0402M -2435.91,-1870.71 r0 top
R23 "" R0402M -408.58,-1887.72 r180 top
R24 "" R0402M -508.58,-1887.72 r0 top
R25 "" R0402M 1081.42,-1847.72 r180 top
R26 "" R0402M 1531.42,-1847.72 r180 top
R27 "" R0402M 981.42,-1847.72 r180 top
R28 "" R0402M 881.42,-1847.72 r0 top
R29 "" R0402M 1431.42,-1847.72 r180 top
R30 "" R0402M 1331.42,-1847.72 r0 top
R31 "" R0402M 1782.6,-787.09 r90 top
R32 "" R0402M -90.55,-818.9 r180 top
R33 "" R0402M 47.72,-982.76 r0 top
R34 "" R0402M 47.72,-1042.76 r0 top
R35 "VSET_1" R0805M -2015.91,-1530.71 r180 top
R36 "VSET_1" R0805M -2015.91,-1450.71 r180 top
R37 "VSET_1" R0805M -2015.91,-1610.71 r180 top
R38 "VSET_1" R0805M -2015.91,-1690.71 r180 top
R39 "VSET_1" R0805M -2015.91,-1770.71 r180 top
R40 "VSET_1" R0805M -2015.91,-1850.71 r180 top
R41 "VSET_1" R0805M -2015.91,-1930.71 r180 top
R42 "VSET_1" R0805M -2015.91,-2010.71 r180 top
R43 "" R0402M -1600.72,-859.14 r90 top
R44A "" R0805M 2809.92,-1266.14 r90 top (schematic designator R44)
R44B "" R0805M 1906.57,-1264.65 r90 top (schematic designator R44)
R44C "" R0805M 81.34,-1262.72 r90 top (schematic designator R44)
R44D "" R0805M -1393.58,-1317.72 r90 top (schematic designator R44)
R44E "" R0805M -3268.58,-1317.72 r90 top (schematic designator R44)
R45A "" R0805M 3109.92,-1268.74 r90 top (schematic designator R45)
R45B "" R0805M 2206.57,-1267.25 r90 top (schematic designator R45)
R45C "" R0805M 381.34,-1265.32 r90 top (schematic designator R45)
R45D "" R0805M -1093.58,-1320.31 r90 top (schematic designator R45)
R45E "" R0805M -2968.66,-1320.32 r90 top (schematic designator R45)
U1A "LMZ14201H" TO-PMOD-7 2379.92,-2841.14 r180 top (schematic designator U1)
U1B "LMZ14201H" TO-PMOD-7 1006.57,-2839.65 r180 top (schematic designator U1)
U1C "LMZ14201H" TO-PMOD-7 -368.66,-2837.72 r180 top (schematic designator U1)
U1D "LMZ14201H" TO-PMOD-7 -1745.04,-2840.79 r180 top (schematic designator U1)
U1E "LMZ14201H" TO-PMOD-7 -3118.66,-2842.72 r180 top (schematic designator U1)
U2A "LTC4225" SSOP24 2959.92,-1591.14 r90 top (schematic designator U2)
U2B "LTC4225" SSOP24 2056.57,-1589.65 r90 top (schematic designator U2)
U2C "LTC4225" SSOP24 231.34,-1587.72 r90 top (schematic designator U2)
U2D "LTC4225" SSOP24 -1243.58,-1642.71 r90 top (schematic designator U2)
U2E "LTC4225" SSOP24 -3118.66,-1642.72 r90 top (schematic designator U2)
U3A "LMZ14201H" TO-PMOD-7 3069.92,-2841.14 r180 top (schematic designator U3)
U3B "LMZ14201H" TO-PMOD-7 1696.57,-2839.65 r180 top (schematic designator U3)
U3C "LMZ14201H" TO-PMOD-7 321.34,-2837.72 r180 top (schematic designator U3)
U3D "LMZ14201H" TO-PMOD-7 -1055.04,-2840.79 r180 top (schematic designator U3)
U3E "LMZ14201H" TO-PMOD-7 -2428.66,-2842.72 r180 top (schematic designator U3)
U4 "VND5E025AK-E" SSO24 -2398.58,-1557.72 r90 top
U5 "VND5E025AK-E" SSO24 -468.58,-1567.72 r90 top
U6 "VND5E025AK-E" SSO24 921.42,-1527.72 r90 top
U7 "VND5E025AK-E" SSO24 1371.42,-1527.72 r90 top
U8 "MCP23017" SSOP28 1530.47,-968.66 r180 top
U9 "MCP23017" SSOP28 -368.35,-1017.72 r180 top
U10 "LTC1477" SO8 2322.91,-952.87 r90 top
U11 "LTC1477" SO8 2805.39,-947.72 r90 top
U12 "MCP23017" SSOP28 -1860.72,-1039.14 r180 top

## Footprints (in the part's own frame and the unit in brackets; to place one, negate y for a bottom-side part, rotate by r counter-clockwise, add the part's x,y. Pads: shape width x height; smd on the part's side, far side on the other; paste and mask are expansions set on the pad)
INDC3216M [mm] "Chip Inductor, Body 3.2x1.6mm, IPC Low Density"
  rect 1.4x2 smd: 1(-1.7,0) 2(1.7,0)
  silkscreen extent -0.6,-0.9 0.6,0.9, body extent -1.75,-0.95 1.75,0.95, height 1.9
J1205M [mm] "Chip Resistor, 2-Leads, Body 1.0x0.5mm, IPC Medium Density"
  rect 0.8x1.3 smd: 1(-1.109,0) 2(-0.009,0) 3(1.091,0)
  body extent -1.32,-0.51 1.35,0.51, height 0.6
"MOLEX 447640802" [mm] "B2B RA Receptacle"
  rrect50% 2x2 hole 1: 1(-4.5,5.59)
  round 2 hole 1: 2(-4.5,8.59) 3(-1.5,5.59) 4(-1.5,8.59) 5(1.5,5.59) 6(1.5,8.59) 7(4.5,5.59) 8(4.5,8.59)
  round 0 hole 2.4 unplated: M1(-3,2.54) M2(3,2.54)
  silkscreen extent -6.35,0 6.35,12.01, body extent -6.35,-8.98 6.35,12, height 10.53
R0402M [mm] "Chip Resistor, 2-Leads, Body 1.0x0.5mm, IPC Medium Density"
  rect 0.8x0.7 smd: 1(-0.55,0) 2(0.55,0)
  body extent -0.55,-0.3 0.55,0.3, height 0.6
R0805M [mm] "Chip Resistor, 2-Leads, Body 2.0x1.3mm, IPC Medium Density"
  rect 1.2x1.35 smd: 1(-0.95,0) 2(0.95,0)
  silkscreen extent -0.15,-0.58 0.15,0.58, body extent -1.1,-0.67 1.1,0.67, height 0.6
R1210M [mm] "Chip Capacitor, 2-Leads, Body 3.2x2.5mm, IPC Medium Density"
  rect 1.35x2.8 smd: 1(-1.475,0) 2(1.475,0)
  silkscreen extent -0.4,-1.3 0.4,1.3, body extent -1.75,-1.4 1.75,1.4, height 1.5
SO8 [mm]
  oval 2.2x0.6 smd: 1(-2.4,1.905) 2(-2.4,0.635) 3(-2.4,-0.635) 4(-2.4,-1.905) 5(2.4,-1.905) 6(2.4,-0.635) 7(2.4,0.635) 8(2.4,1.905)
  silkscreen extent -2.52,-2.5 0.9,2.88, body extent -2,-2.5 2,2.5, height 1.8
SSO24 [mm]
  oval 1.8x0.6 smd: 3(-4.75,2.8) 5(-4.75,1.2) 7(-4.75,-0.4) 9(-4.75,-2) CS1(-4.75,-1.2) CS2(-4.75,-2.8) CS_DIS(-4.75,-3.6) GND(-4.75,3.6) IN1(-4.75,0.4) IN2(-4.75,2) OUT1(4.75,-4.4) OUT1(4.75,-3.6) OUT1(4.75,-2.8) OUT1(4.75,-2) OUT1(4.75,-1.2) OUT1(4.75,-0.4) OUT2(4.75,0.4) OUT2(4.75,1.2) OUT2(4.75,2) OUT2(4.75,2.8) OUT2(4.75,3.6) OUT2(4.75,4.4) VCC(-4.75,-4.4) VCC(-4.75,4.4)
  rect 5x7.4 smd: VCC(0,0)
  silkscreen extent -4.87,-5.25 3.45,5.37, body extent -3.8,-5.25 3.8,5.25, height 2.45
SSOP24 [mm]
  oval 2.2x0.35 smd: 1(-2.4,3.492) 2(-2.4,2.857) 3(-2.4,2.222) 4(-2.4,1.587) 5(-2.4,0.952) 6(-2.4,0.317) 7(-2.4,-0.318) 8(-2.4,-0.953) 9(-2.4,-1.588) 10(-2.4,-2.222) 11(-2.4,-2.857) 12(-2.4,-3.492) 13(2.4,-3.492) 14(2.4,-2.857) 15(2.4,-2.222) 16(2.4,-1.587) 17(2.4,-0.952) 18(2.4,-0.317) 19(2.4,0.318) 20(2.4,0.953) 21(2.4,1.588) 22(2.4,2.222) 23(2.4,2.857) 24(2.4,3.492)
  silkscreen extent -2.52,-4.35 0.9,4.35, body extent -2,-4.35 2,4.35, height 1.1
SSOP28 [mm]
  oval 2.1x0.45 smd: 1(-3.45,4.225) 2(-3.45,3.575) 3(-3.45,2.925) 4(-3.45,2.275) 5(-3.45,1.625) 6(-3.45,0.975) 7(-3.45,0.325) 8(-3.45,-0.325) 9(-3.45,-0.975) 10(-3.45,-1.625) 11(-3.45,-2.275) 12(-3.45,-2.925) 13(-3.45,-3.575) 14(-3.45,-4.225) 15(3.45,-4.225) 16(3.45,-3.575) 17(3.45,-2.925) 18(3.45,-2.275) 19(3.45,-1.625) 20(3.45,-0.975) 21(3.45,-0.325) 22(3.45,0.325) 23(3.45,0.975) 24(3.45,1.625) 25(3.45,2.275) 26(3.45,2.925) 27(3.45,3.575) 28(3.45,4.225)
  silkscreen extent -3.58,-5.25 2,5.25, body extent -2.8,-5.25 2.8,5.25, height 2
TO-PMOD-7 [mm]
  rect 0.89x3.06 smd: 1(-3.81,-7.305) 2(-2.54,-7.305) 3(-1.27,-7.305) 4(0,-7.305) 5(1.27,-7.305) 6(2.54,-7.305) 7(3.81,-7.305)
  rect 5.35x8.54 smd: 4(0,0)
  silkscreen extent -5.08,-6.35 5.08,6.35, body extent -4.75,-5 4.75,6, height 5.08
TSSOP8 [mm]
  oval 1.55x0.35 smd: D1(-2.875,0.975) D2(2.875,0.975) G1(-2.875,-0.975) G2(2.875,-0.975) S1(-2.875,-0.325) S1(-2.875,0.325) S2(2.875,-0.325) S2(2.875,0.325)
  silkscreen extent -3,-1.55 1.7,1.82, body extent -2.25,-1.55 2.25,1.55, height 1.2

## Part data
C1A C1B C1C C1D C1E C2A C2B C2C C2D C2E C3A C3B C3C C3D C3E C4A C4B C4C C4D C4E C5A C5B C5C C5D C5E C6A C6B C6C C6D C6E C7A C7B C7C C7D C7E C8A C8B C8C C8D C8E C9A C9B C9C C9D C9E C10A C10B C10C C10D C10E C11A C11B C11C C11D C11E C12A C12B C12C C12D C12E C13A C13B C13C C13D C13E C14A C14B C14C C14D C14E C15A C15B C15C C15D C15E C16A C16B C16C C16D C16E C17A C17B C17C C17D C17E C18A C18B C18C C18D C18E C19A C19B C19C C19D C19E C20 C21 C22 C23 C24 C25 C26 C27 C28 C29 C30 C31 C32 C33 C34 C35 C36 C37: library part Cap, "Capacitor"
D1 D2: "Typical INFRARED GaAs LED"
FB1A FB1B FB1C FB1D FB1E FB2A FB2B FB2C FB2D FB2E: library part Inductor, "Inductor"
JB1 JB2 JB3: library part "MOLEX 447640802", "B2B RA Receptacle"
L1 L2 L3 L4 L5 L6 L7 L8 L9 L10 L11 L12 L13 L14 L15: library part Inductor, "Ferrite Bead"
Q1A Q1B Q1C Q1D Q1E Q2A Q2B Q2C Q2D Q2E: "N-Channel MOSFET"
R1 R1A R1B R1C R1D R1E R2 R2A R2B R2C R2D R2E R3 R3A R3B R3C R3D R3E R4 R4A R4B R4C R4D R4E R5 R5A R5B R5C R5D R5E R6 R6A R6B R6C R6D R6E R7 R7A R7B R7C R7D R7E R8 R8A R8B R8C R8D R8E R9A R9B R9C R9D R9E R10A R10B R10C R10D R10E R11A R11B R11C R11D R11E R12A R12B R12C R12D R12E R13A R13B R13C R13D R13E R14A R14B R14C R14D R14E R15A R15B R15C R15D R15E R16A R16B R16C R16D R16E R17A R17B R17C R17D R17E R18A R18B R18C R18D R18E R19 R20 R21 R22 R23 R24 R25 R26 R27 R28 R29 R30 R31 R32 R33 R34 R35 R36 R37 R38 R39 R40 R41 R42 R43 R44A R44B R44C R44D R44E R45A R45B R45C R45D R45E: library part Res3, "Resistor"
U1A U1B U1C U1D U1E U3A U3B U3C U3D U3E: "1A SIMPLE SWITCHER® Power Module for High Output  Voltage"
U2A U2B U2C U2D U2E: "Dual Ideal Diode and  Hot Swap Controller"
U4 U5 U6 U7: "Double channel high-side driver with analog current sense"
U8 U9 U12: "16-Bit I/O Expander with Serial Interface"
U10 U11: "Single Protected High Side Switches"

## Free pads (board coordinates)
  round 236.22 hole 122.05: 0(-3425.2,-291.34) 0(3425.2,-291.34)
  round 275.59 hole 137.8: 0(-3425.2,-3425.2) 0(0,-291.34) 0(0,-3425.2) 0(3425.2,-3425.2)

## Via types
v1: diameter 27.56, hole 11.81, Top Layer to Bottom Layer, tented both sides, 325 vias
v2: diameter 25.98, hole 12.99, Top Layer to Bottom Layer, tented both sides, 96 vias
v3: diameter 50, hole 28, Top Layer to Bottom Layer, tented both sides, 40 vias

## Nets (pads, with @x,y where several pads share a name; then routed paths per layer and width w, separated by ;. In a path a pad name is that pad's centre, name@x,y a point inside that pad or via, vN(x,y) a via of type N, cw(c..) or ccw(c..) an arc to the next point about the centre after c; other vN are vias at no path point)
3V0_PAYLOAD_EN: U8.7 U11.4 | length 1550.4
  Top Layer w6: v1(1544.09,-1000.71) 1563.35,-981.46 U8.7@1666.3,-981.46 ; U11.4@2884.09,-1038.5 v1(2884.09,-970.71)
  Bottom Layer w6: v1(1544.09,-1000.71) 1568.43,-976.38 2878.43,-976.38 v1(2884.09,-970.71)
3V3_BUS: C1A.2 C20.1 C21.1 C22.1 J1.1 J2.1 J3.1 J4.1 J5.1 J6.1 J7.1 J8.1 J9.1 L11.1 Q1A.S2 Q2A.S1 R31.1 R32.1 R43.1 U2A.14 U2A.23 U8.9 U9.9 U11.2 U11.3 U11.6 U11.7 U12.9 | length 2547.8
  Top Layer w6: v1(-2357.06,-992.79) J9.1@-2110.72,-992.79 ; U12.9@-1724.89,-1000.75 -1646.5,-1000.75 C22.1@-1600.72,-1046.54 ; R43.1@-1599.62,-881.89 v1(-1566.93,-881.89) ; v1(-864.69,-971.37) J6.1@-618.35,-971.37 ; U9.9@-232.52,-979.33 -154.13,-979.33 -135.35,-998.11 C21.1@-105.91,-998.11 C21.1@-81.34,-998.11 ; R32.1@-68.9,-818.9 v1(-35.43,-818.9) ; v1(1021.09,-922.66) J3.1@1280.47,-922.66 ; U8.9@1666.3,-930.28 1744.68,-930.28 C20.1@1790.47,-976.06 ; R31.1@1791.57,-811.76 v1(1824.26,-811.76)
  Top Layer w10: Q1A.S2@2572.13,-1477.95 2572.13,-1442.09 2588.07,-1426.14 2594.92,-1426.14 2597.72,-1428.94 Q1A.S2@2597.72,-1477.95 ; v1(2763.78,-1426.14) 2824.92,-1426.14 2847.42,-1448.64 U2A.23@2847.42,-1496.65 ; U11.2@2781.42,-1013.7 U11.7@2781.42,-824.72 ; U11.3@2831.42,-1013.7 U11.6@2831.42,-824.72 ; U2A.14@3072.42,-1496.65 v1(3072.42,-1397.15) ; Q2A.S1@3322.13,-1477.95 3322.13,-1440.16 3334.92,-1427.36 ; 3334.92,-1408.07 3334.92,-1427.36 ; Q2A.S1@3347.72,-1477.95 3347.72,-1440.16 3334.92,-1427.36
  Top Layer w40: L11.1@-385.83,-275.59 v1(-336.61,-324.8) v1(-316.93,-344.49) ; v1(2588.07,-1415.12) v1(2588.07,-1350.39) ; 3334.92,-1415.12 v1(3334.92,-1193.38)
  other v1: 3072.42,-1428.64 2795.28,-1426.14 2588.07,-1381.89 3334.92,-1259.84 3334.92,-1226.61 -1645.67,-1003.94 -153.3,-982.52 2781.42,-948.82 2831.42,-948.82 1745.52,-933.81 2781.42,-917.32 2831.42,-917.32
3V3_BUS_CON: C33.1 JB3.2 L11.2 | length 369
  Top Layer w40: JB3.2@-826.77,-302.76 -766.72,-242.7 -652.62,-242.7 -612.2,-283.11 C33.1@-612.2,-295.28 -539.37,-295.28 L11.2@-519.69,-275.59
3V3_FAULT1: U2A.21 U8.4 | length 1691.7
  Top Layer w6: U8.4@1666.3,-1058.23 1716.3,-1058.23 1717.9,-1056.63 v1(1896.12,-1056.63) ; U2A.21@2897.42,-1496.65 2897.42,-1530.54 2915.84,-1548.96 2945.9,-1548.96 v1(2977.65,-1580.71)
  Bottom Layer w6: v1(1896.12,-1056.63) 1901.31,-1061.82 1933.53,-1061.82 1946.87,-1075.16 1946.87,-1090.41 2021.58,-1165.12 2594.09,-1165.12 2977.65,-1548.68 v1(2977.65,-1580.71)
3V3_FAULT2: U2A.16 U8.5 | length 1678
  Top Layer w6: U8.5@1666.3,-1032.64 1920.11,-1032.64 v1(1924.09,-1028.65) ; v1(3011.21,-1580.71) 3022.42,-1569.5 U2A.16@3022.42,-1496.65
  Bottom Layer w6: v1(1924.09,-1028.65) 2034.97,-1139.53 2594.09,-1139.53 3011.21,-1556.65 v1(3011.21,-1580.71)
3V3_PAYLOAD: L10.1 U11.1 U11.8 | length 3671.4
  Top Layer w20: 2680.24,-1042.2 U11.1@2730.39,-1042.2 ; 2681.26,-853.23 U11.8@2730.39,-853.23
  Top Layer w40: L10.1@-385.83,-157.48 -80.91,-462.39 2342.31,-462.39 2678.74,-798.82 2678.74,-1040.71
3V3_PAYLOAD_CON: C32.1 JB3.1 L10.2 | length 346.5
  Top Layer w40: JB3.1@-826.77,-184.65 -821.05,-190.37 -652.62,-190.37 -612.2,-149.96 C32.1@-612.2,-137.8 -539.37,-137.8 L10.2@-519.69,-157.48
3V3_PWRGD1: U2A.22 U8.3 | length 1644.2
  Top Layer w6: U8.3@1666.3,-1083.82 1923.31,-1083.82 v1(1924.09,-1084.6) ; U2A.22@2872.42,-1496.65 2872.42,-1549.04 2894.09,-1570.71 2934.09,-1570.71 v1(2944.09,-1580.71)
  Bottom Layer w6: v1(1924.09,-1084.6) 2030.2,-1190.71 2594.09,-1190.71 2944.09,-1540.71 v1(2944.09,-1580.71)
3V3_PWRGD2: U2A.15 U8.6 | length 1724.9
  Top Layer w6: U8.6@1666.3,-1007.05 1889.76,-1007.05 v1(1896.12,-1000.68) ; v1(3044.77,-1580.71) 3044.77,-1499.3 U2A.15@3047.42,-1496.65
  Bottom Layer w6: v1(1896.12,-1000.68) 1901.31,-1005.87 1933.53,-1005.87 1946.87,-1019.22 1946.87,-1034.46 2026.35,-1113.94 2594.09,-1113.94 3044.77,-1564.61 v1(3044.77,-1580.71)
5V0_BUS: C1B.2 L13.1 Q1B.S2 Q2B.S1 U2B.14 U2B.23 U10.2 U10.3 U10.6 U10.7 | length 5592.1
  Top Layer w10: Q1B.S2@1668.78,-1476.46 1668.78,-1440.59 1684.72,-1424.65 1691.57,-1424.65 ; Q1B.S2@1694.37,-1476.46 1694.37,-1427.44 1691.57,-1424.65 ; U2B.23@1944.07,-1495.16 1944.07,-1450.69 1918.03,-1424.65 1691.57,-1424.65 ; U2B.14@2169.07,-1495.16 2169.07,-1450.06 2244.15,-1374.99 2244.15,-1250.65 2316.71,-1178.09 2371.04,-1178.09 ; U10.2@2297.91,-1047.36 2297.91,-1135.12 2301.42,-1138.62 ; U10.2@2301.42,-1032.2 U10.7@2301.42,-843.23 ; 2341.42,-1147.72 2347.91,-1141.22 U10.3@2347.91,-1047.36 ; U10.3@2351.42,-1032.2 U10.6@2351.42,-843.23 ; Q2B.S1@2418.78,-1476.46 2418.78,-1438.66 ; 2418.78,-1427.44 2418.78,-1438.66 ; Q2B.S1@2444.37,-1476.46 2444.37,-1438.66 ; 2444.37,-1427.44 2444.37,-1438.66 ; 2418.78,-1438.66 2431.57,-1425.87 2444.37,-1438.66
  Top Layer w40: L13.1@-385.83,-511.81 -343.24,-554.39 1737.78,-554.39 2024.09,-840.71 2024.09,-1138.62 ; 1684.72,-1413.62 1684.72,-1235.48 1781.57,-1138.62 2024.09,-1138.62 ; 2431.57,-1413.62 2431.57,-1406.58 2431.57,-1238.62 2371.04,-1178.09 2331.57,-1138.62 2301.42,-1138.62 2024.09,-1138.62
5V0_BUS_CON: C35.1 JB3.6 L13.2 | length 680.6
  Top Layer w40: JB3.6@-1062.99,-302.76 -893.16,-472.59 -806.94,-472.59 -734.83,-544.7 -652.62,-544.7 -612.2,-504.29 C35.1@-612.2,-492.13 -539.37,-492.13 L13.2@-519.69,-511.81
5V0_EN1: R6B.2 R9B.1 U1B.3 U8.25 | length 2272.4
  Top Layer w6: R9B.1@1106.57,-2252.05 1106.57,-2293.19 v1(1124.09,-2310.71) ; v1(1124.09,-1980.71) 1194.09,-1910.71 1564.09,-1910.71 1594.09,-1880.71 v1(1594.09,-1360.71) ; U8.25@1394.65,-1058.23 v1(1461.61,-1058.23)
  Top Layer w10: U1B.3@1056.57,-2552.05 1056.57,-2302.05 R9B.1@1106.57,-2252.05 R6B.2@1206.57,-2252.05
  Bottom Layer w6: v1(1124.09,-2310.71) v1(1124.09,-1980.71) ; v1(1461.61,-1058.23) 1461.61,-1178.23 1594.09,-1310.71 v1(1594.09,-1360.71)
5V0_EN2: R15B.2 R18B.1 U3B.3 U8.26 | length 1953.2
  Top Layer w6: U8.26@1394.65,-1083.82 v1(1487.2,-1083.82) ; R18B.1@1796.57,-2252.05 1804.09,-2259.57 v1(1804.09,-2320.71)
  Top Layer w10: U3B.3@1746.57,-2552.05 1746.57,-2302.05 1784.07,-2264.55 R18B.1@1796.57,-2252.05 R15B.2@1896.57,-2252.05
  Bottom Layer w6: v1(1487.2,-1083.82) 1487.2,-1173.82 1804.09,-1490.71 v1(1804.09,-2320.71)
5V0_FAULT1: U2B.21 U8.27 | length 797
  Top Layer w6: U8.27@1394.65,-1109.41 1446.3,-1109.41 1453.87,-1116.98 v1(1567.82,-1116.98) ; v1(1954.09,-1390.71) 1994.07,-1430.69 U2B.21@1994.07,-1495.16
  Bottom Layer w6: v1(1567.82,-1116.98) 1630.36,-1116.98 1904.09,-1390.71 v1(1954.09,-1390.71)
5V0_FAULT2: U2B.16 U8.1 | length 778.2
  Top Layer w6: v1(1622.29,-1212.51) 1624.09,-1210.71 1624.09,-1177.2 U8.1@1666.3,-1135 ; v1@2119.07,-1545.73 U2B.16@2119.07,-1495.16
  Bottom Layer w6: v1(1622.29,-1212.51) 1960.49,-1550.71 v1(2114.09,-1550.71)
5V0_PAYLOAD: L12.1 U10.1 U10.8 | length 3098.2
  Top Layer w20: 2196.42,-858.39 U10.8@2247.91,-858.39 ; 2197.44,-1047.36 U10.1@2247.91,-1047.36
  Top Layer w40: L12.1@-385.83,-393.7 -271.13,-508.39 1897.92,-508.39 2194.09,-804.57 2194.09,-1050.71
5V0_PAYLOAD_CON: C34.1 JB3.4 L12.2 | length 513.5
  Top Layer w40: JB3.4@-944.88,-302.76 -821.05,-426.59 -652.62,-426.59 -612.2,-386.18 C34.1@-612.2,-374.02 -539.37,-374.02 L12.2@-519.69,-393.7
5V0_PAYLOAD_EN: U8.8 U10.4 | length 1147.7
  Top Layer w6: v1(1520.36,-976.98) 1541.48,-955.87 U8.8@1666.3,-955.87 ; U10.4@2397.91,-1047.36 v1@2397.91,-951.3
  Bottom Layer w6: v1(1520.36,-976.98) 1536.71,-960.63 2388.58,-960.63 v1(2404.09,-945.12)
5V0_PWRGD1: U2B.22 U8.28 | length 756.4
  Top Layer w6: U8.28@1394.65,-1135 1538.39,-1135 v1(1544.09,-1140.71) ; v1(1954.09,-1424.27) 1969.07,-1439.25 U2B.22@1969.07,-1495.16
  Bottom Layer w6: v1(1544.09,-1140.71) 1617.9,-1140.71 1901.46,-1424.27 v1(1954.09,-1424.27)
5V0_PWRGD2: U2B.15 U8.2 | length 951.5
  Top Layer w6: v1(1594.09,-1230.71) 1598.5,-1226.3 1598.5,-1127.2 1616.3,-1109.41 U8.2@1666.3,-1109.41 ; v1(2144.07,-1570.69) U2B.15@2144.07,-1495.16
  Bottom Layer w6: v1(1594.09,-1230.71) 1939.69,-1576.3 2138.46,-1576.3 v1(2144.07,-1570.69)
9V1: C1C.2 Q1C.S2 Q2C.S1 R25.1 R26.1 U2C.14 U2C.23 U6.VCC U7.VCC | length 4083.4
  Top Layer w6: U6.VCC@1094.65,-1714.72 1103.07,-1723.15 R25.1@1103.07,-1847.72 ; U7.VCC@1544.65,-1714.72 1553.07,-1723.15 R26.1@1553.07,-1847.72
  Top Layer w10: Q1C.S2@-156.46,-1474.53 -156.46,-1438.66 -140.51,-1422.72 -133.66,-1422.72 ; Q1C.S2@-130.87,-1474.53 -130.87,-1425.51 -133.66,-1422.72 ; U2C.23@118.84,-1493.23 118.84,-1445.22 96.34,-1422.72 -133.66,-1422.72 ; U2C.14@343.84,-1493.23 343.84,-1425.22 364.41,-1404.65 606.34,-1404.65 ; Q2C.S1@593.54,-1474.53 593.54,-1425.51 ; Q2C.S1@619.13,-1474.53 619.13,-1425.51 ; U6.VCC@748.19,-1714.72 748.19,-1646.61 867.09,-1527.72 U6.VCC@921.42,-1527.72 981.1,-1527.72 1094.65,-1641.26 U6.VCC@1094.65,-1714.72 ; U7.VCC@1198.19,-1714.72 1198.19,-1656.61 1327.09,-1527.72 U7.VCC@1371.42,-1527.72 1421.1,-1527.72 1544.65,-1651.26 U7.VCC@1544.65,-1714.72
  Top Layer w40: -140.51,-1411.7 -140.51,-1315.32 38.11,-1136.7 506.34,-1136.7 606.34,-1236.7 606.34,-1404.65 606.34,-1411.69 665.39,-1411.69 781.42,-1527.72 U6.VCC@867.09,-1527.72 ; U6.VCC@981.1,-1527.72 U7.VCC@1327.09,-1527.72
  other v2: 803.31,-1598.58 850.55,-1598.58 897.8,-1598.58 945.04,-1598.58 992.28,-1598.58 1039.53,-1598.58 1253.31,-1598.58 1300.55,-1598.58 1347.8,-1598.58 1395.04,-1598.58 1442.28,-1598.58 1489.53,-1598.58 803.31,-1551.34 850.55,-1551.34 897.8,-1551.34 945.04,-1551.34 992.28,-1551.34 1039.53,-1551.34 1253.31,-1551.34 1300.55,-1551.34 1347.8,-1551.34 1395.04,-1551.34 1442.28,-1551.34 1489.53,-1551.34 803.31,-1504.09 850.55,-1504.09 897.8,-1504.09 945.04,-1504.09 992.28,-1504.09 1039.53,-1504.09 1253.31,-1504.09 1300.55,-1504.09 1347.8,-1504.09 1395.04,-1504.09 1442.28,-1504.09 1489.53,-1504.09 803.31,-1456.85 850.55,-1456.85 897.8,-1456.85 945.04,-1456.85 992.28,-1456.85 1039.53,-1456.85 1253.31,-1456.85 1300.55,-1456.85 1347.8,-1456.85 1395.04,-1456.85 1442.28,-1456.85 1489.53,-1456.85
9V1_EN1: R6C.2 R9C.1 U1C.3 U9.1 | length 1602.9
  Top Layer w6: R9C.1@-268.66,-2250.12 -255.91,-2262.87 v1(-255.91,-2300.71) ; v1(-235.91,-1990.71) -235.91,-1187.44 U9.1@-232.52,-1184.06
  Top Layer w10: U1C.3@-318.66,-2550.12 -318.66,-2300.12 R9C.1@-268.66,-2250.12 R6C.2@-168.66,-2250.12
  Bottom Layer w6: v1(-255.91,-2300.71) -235.91,-2280.71 v1(-235.91,-1990.71)